# Altium PCB DRV8711.PcbDoc
Units mil, origin at the board's own origin, x right, y up, seen from the top; angles counter-clockwise.
Board outline 6000 x 4000 mil, 2 copper layers (Top Layer, Bottom Layer); 58 components, 44 nets, 187 pads, 101 vias.
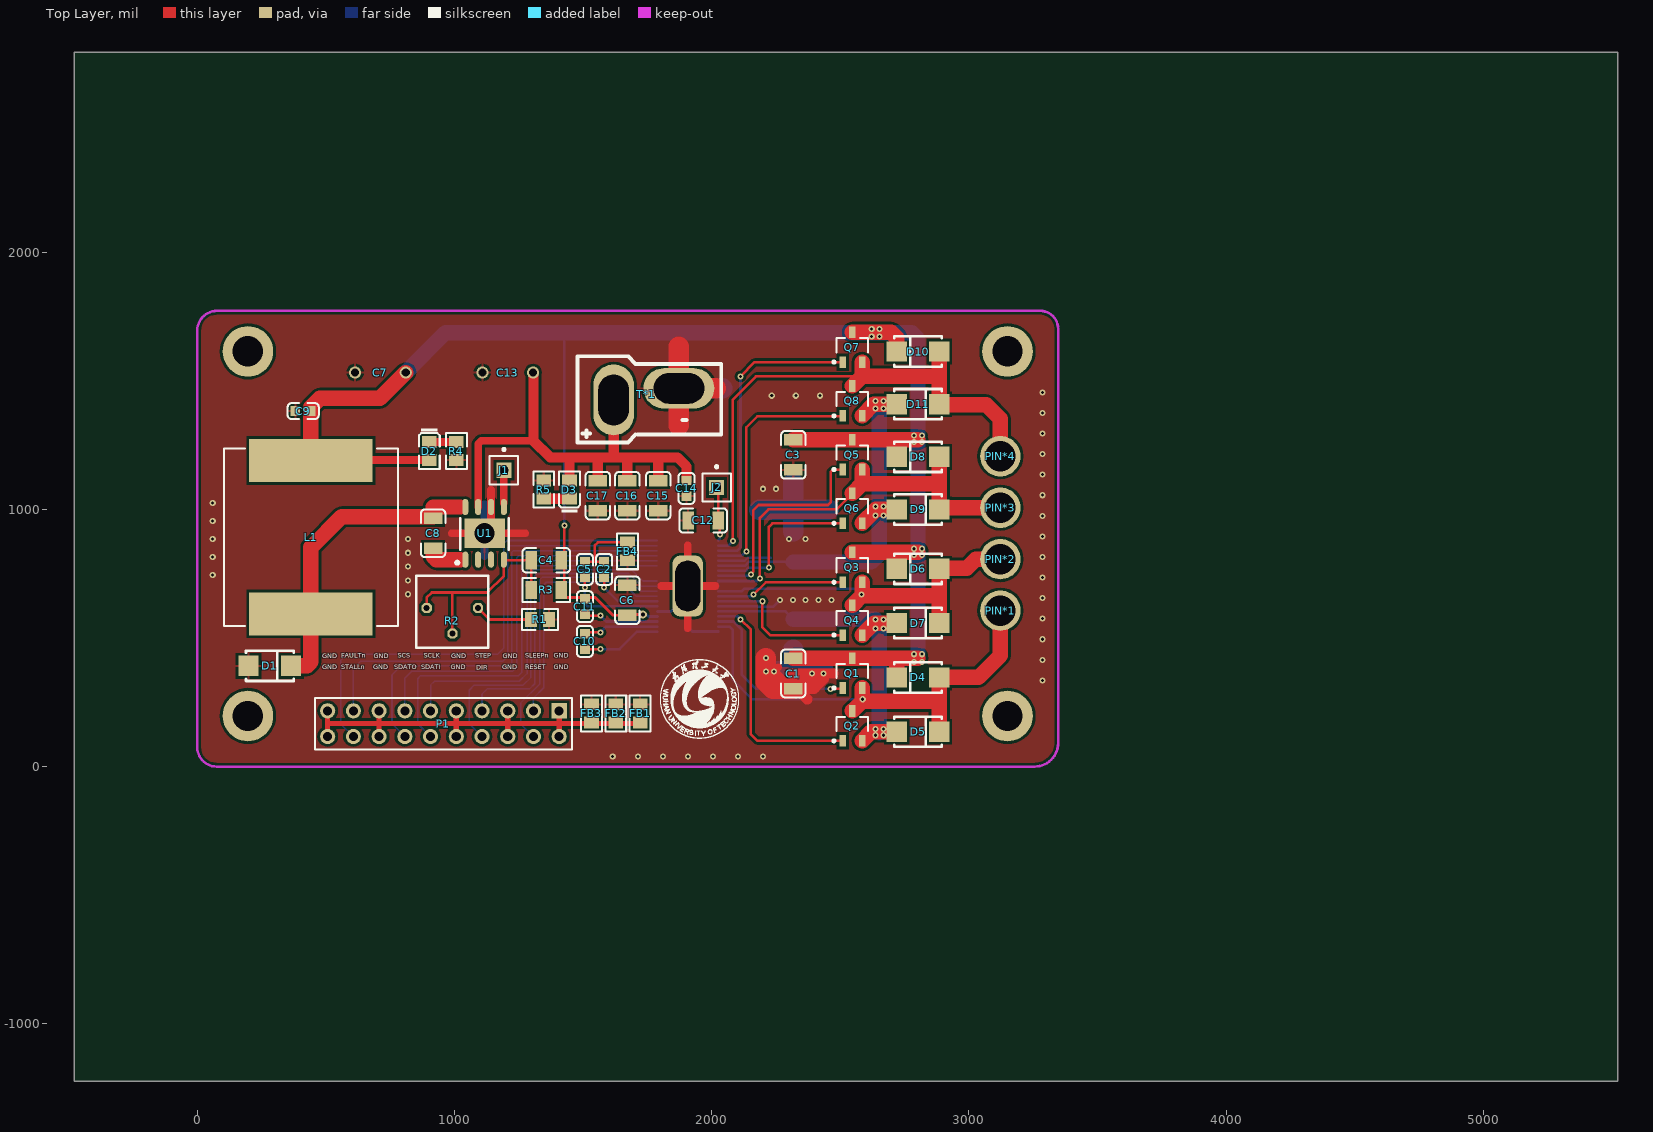
[diagram p0: Top Layer view]
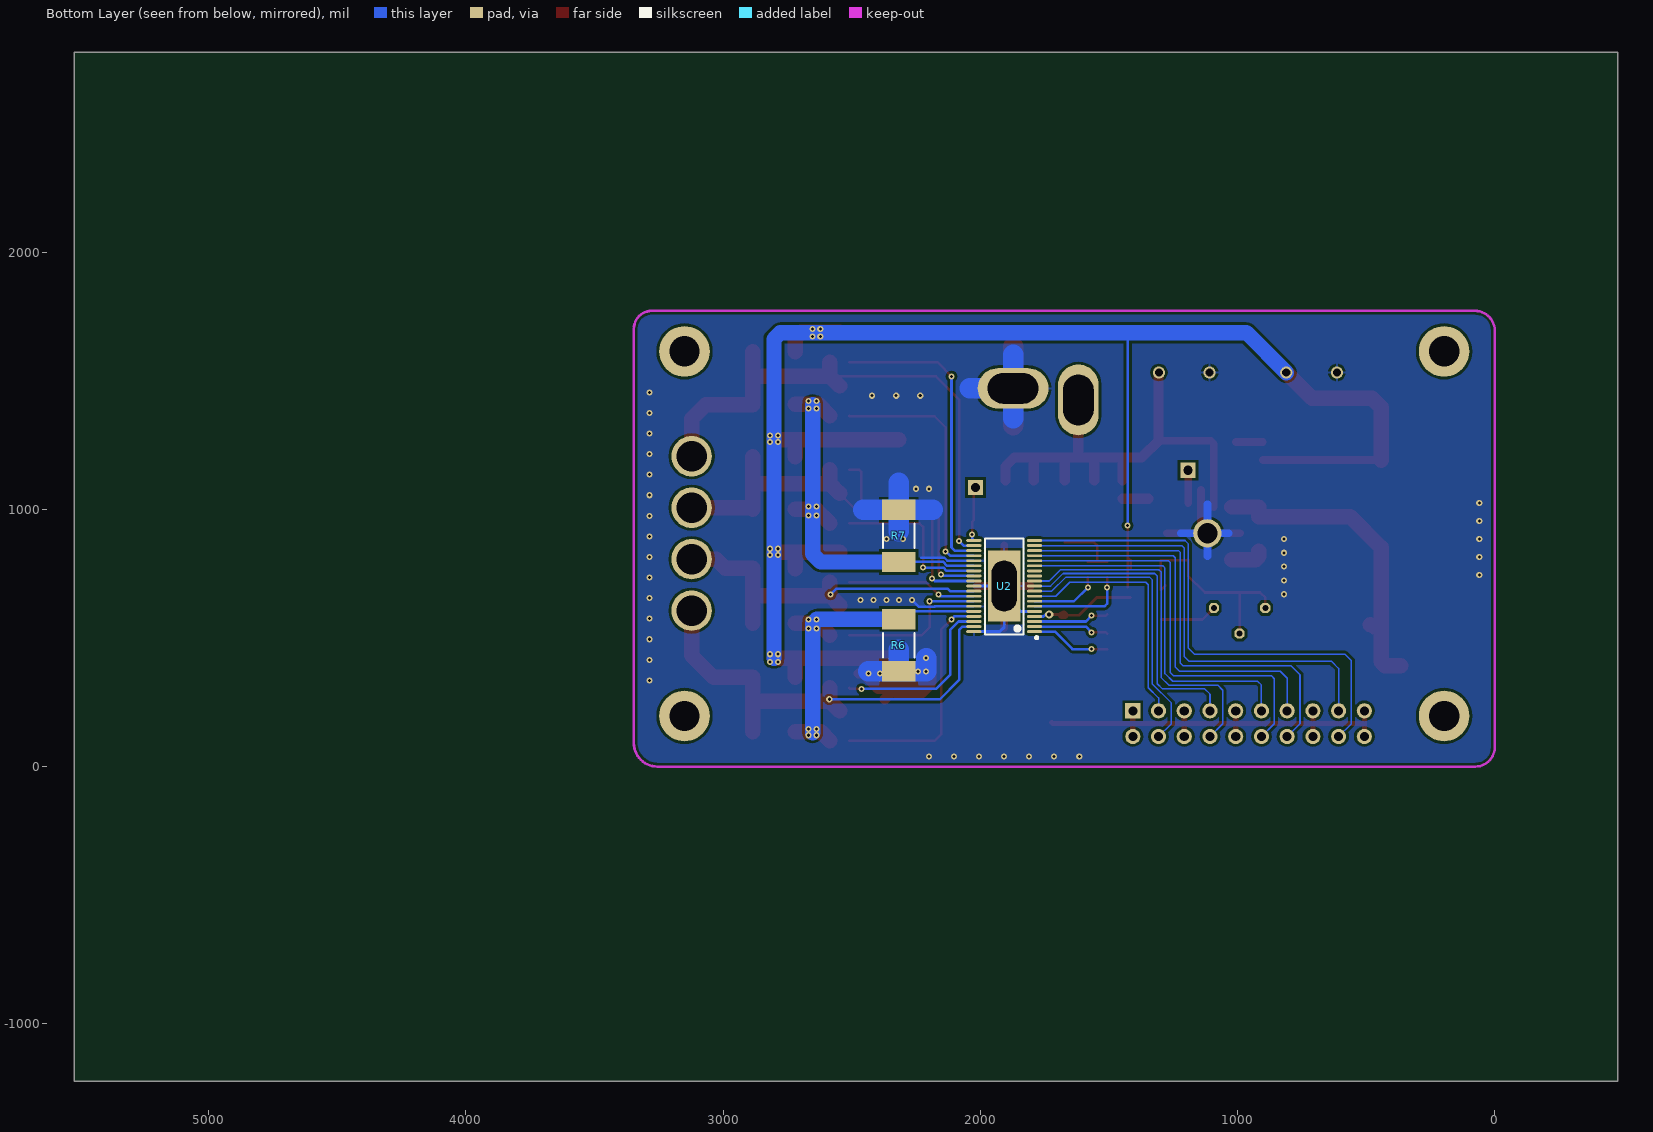
[diagram p1: Bottom Layer view, seen from below]

## Layer stack, top to bottom
Top Solder: solder mask 0.4, Solder Resist, Dk 3.5
Top Layer: signal copper 1.4
Dielectric 1: dielectric 12.6, FR-4, Dk 4.8
Bottom Layer: signal copper 1.4
Bottom Solder: solder mask 0.4, Solder Resist, Dk 3.5

## Board outline
-478.15,-1223.15 5521.85,-1223.15 5521.85,2776.85 -478.15,2776.85

## Design rules (kind name [scope] priority, off if disabled: settings)
Clearance [All] p1: gap=10 ignorepadtopadclearanceinfootprint=FALSE except(0: Arc-Hole Track-Hole SMDPad-Hole THPad-Hole Via-Hole Fill-Hole Poly-Hole Region-Hole Text-Hole; 5: Arc-Arc Arc-Track Arc-SMDPad Arc-Via Track-Track Track-SMDPad Track-Via SMDPad-SMDPad SMDPad-Via THPad-Via)
PolygonConnect [All] p1: thpad.connectstyle=Relief thpad.reliefconductorwidth=10 thpad.reliefentries=4 thpad.polygonreliefangle="90 Angle" thpad.airgapwidth=10 smdpad.connectstyle=Relief smdpad.reliefconductorwidth=10 smdpad.reliefentries=4 smdpad.polygonreliefangle="90 Angle" smdpad.airgapwidth=10 via.connectstyle=Direct via.reliefconductorwidth=10 via.reliefentries=4 via.polygonreliefangle="90 Angle" via.airgapwidth=10
RoutingVias [All] p1: holewidth=28 width=50 viastyle="Through Hole" minholewidth=11.81 minwidth=23.62 maxholewidth=28 maxwidth=50
SolderMaskExpansion [All] p1: expansion=4
Width [All] p1: maxlimit=90 minlimit=5 preferedwidth=20 minimp=50.000000 maximp=50.000000 favimp=50.000000
30 further rules are at their usual default settings.

## Components (designator, comment, footprint, x,y, rotation, side; value= is the part's Value field where it differs from the comment)
C1 "10uF (106) 10% 50V" 1206_C 2316.85,361.85 r90 top
C2 "1uF (105) 10% 50V" 0603_C 1581.85,766.85 r270 top
C3 "10uF (106) 10% 50V" 1206_C 2316.85,1211.85 r90 top
C4 "1nF (102) 10% 500V" 1206_C 1356.85,801.85 r180 top
C5 "100nF (104) 10% 50V" 0603_C 1506.85,766.85 r270 top
C6 "4.7uF (475) 10% 50V" 1206_C 1671.85,646.85 r90 top
C7 "Cap" C100uF 711.85,1531.85 r90 top value=100uF
C8 "10nF (103) 10% 50V" 1206_C 916.85,906.85 r90 top
C9 "10nF (103) 10% 50V" 0603_C 411.85,1381.85 r0 top
C10 "100nF (104) 10% 50V" 0603_C 1506.85,486.85 r270 top
C11 "1uF (105) 10% 50V" 0603_C 1506.85,621.85 r270 top
C12 "1nF (102) 10% 500V" 1206_C 1966.85,956.85 r0 top
C13 "Cap" C100uF 1206.85,1531.85 r90 top value=100uF
C14 "100nF (104) 10% 50V" 0603_C 1901.85,1081.85 r90 top
C15 "10uF (106) 10% 50V" 1206_C 1791.85,1053.19 r90 top
C16 "10uF (106) 10% 50V" 1206_C 1671.85,1053.19 r90 top
C17 "4.7uF (475) 10% 50V" 1206_C 1556.85,1053.19 r270 top
D1 "SS54" SMA(DO-214AC)_S1 281.85,391.85 r180 top
D2 "蓝灯 0805" 0805_LED_S1 901.85,1226.85 r270 top
D3 "红灯 0805" 0805_LED_S1 1446.85,1076.85 r90 top
D4 "SS54" SMA(DO-214AC)_S1 2801.85,346.61 r0 top
D5 "SS54" SMA(DO-214AC)_S1 2801.85,135.42 r180 top
D6 "SS54" SMA(DO-214AC)_S1 2801.85,768.99 r0 top
D7 "SS54" SMA(DO-214AC)_S1 2801.85,557.8 r180 top
D8 "SS54" SMA(DO-214AC)_S1 2801.85,1204.23 r0 top
D9 "SS54" SMA(DO-214AC)_S1 2801.85,999.71 r180 top
D10 "SS54" SMA(DO-214AC)_S1 2801.85,1613.28 r0 top
D11 "SS54" SMA(DO-214AC)_S1 2801.85,1408.76 r180 top
FB1 "600Ω ±25% 100MHz" 0805_L 1721.85,206.89 r90 top
FB2 "600Ω ±25% 100MHz" 0805_L 1626.85,206.89 r90 top
FB3 "100Ω ±25% 100MHz" 0805_L 1531.85,206.89 r90 top
FB4 "600Ω ±25% 100MHz" 0805_L 1671.85,836.85 r270 top
J1 "Socket" PIN1 1191.85,1151.85 r0 top
J2 "Socket" PIN1 2018.87,1085 r0 top
L1 "Inductor" INDP175172X70M 441.85,891.85 r90 top value=15uH
P1 "Header 10X2" HDR2X10 1406.85,216.85 r180 top
PIN*1 "PIN" PIN 3121.85,606.54 r270 top
PIN*2 "PIN" PIN 3121.85,806.54 r270 top
PIN*3 "PIN" PIN 3121.85,1006.54 r270 top
PIN*4 "PIN" PIN 3121.85,1206.54 r270 top
Q1 "AO3400A N道沟 X0YV1T SOT-23" SOT-23-3L 2546.85,363.76 r270 top
Q2 "AO3400A N道沟 X0YV1T SOT-23" SOT-23-3L 2546.85,158.28 r270 top
Q3 "AO3400A N道沟 X0YV1T SOT-23" SOT-23-3L 2546.85,774.71 r270 top
Q4 "AO3400A N道沟 X0YV1T SOT-23" SOT-23-3L 2546.85,569.23 r270 top
Q5 "AO3400A N道沟 X0YV1T SOT-23" SOT-23-3L 2546.85,1212.8 r270 top
Q6 "AO3400A N道沟 X0YV1T SOT-23" SOT-23-3L 2546.85,1003.99 r270 top
Q7 "AO3400A N道沟 X0YV1T SOT-23" SOT-23-3L 2546.85,1630.42 r270 top
Q8 "AO3400A N道沟 X0YV1T SOT-23" SOT-23-3L 2546.85,1421.61 r270 top
R1 "510Ω (5100) ±1%" 0805_R 1331.85,571.85 r180 top
R2 "RPot" RP1 991.85,566.85 r180 top value=1K
R3 "10KΩ (1002) ±1%" 1206_R 1356.85,686.85 r180 top
R4 "5.1KΩ (5101) ±1%" 0805_R 1006.85,1226.85 r270 top
R5 "5.1KΩ (5101) ±1%" 0805_R 1346.85,1076.85 r90 top
R6 "Res" 2512 2316.85,471.85 r270 bottom value=0.15R
R7 "Res" 2512 2316.85,896.85 r90 bottom value=0.15R
T*1 "T头" T插 1821.85,1441.85 r180 top
U1 "TPS5450" LC-SOP-8_EP_150mil 1116.85,906.85 r0 top
U2 "DRV8711" LC-HTSSOP-38 1906.85,701.85 r90 bottom

## Footprints (in the part's own frame and the unit in brackets; to place one, negate y for a bottom-side part, rotate by r counter-clockwise, add the part's x,y. Pads: shape width x height; smd on the part's side, far side on the other; paste and mask are expansions set on the pad)
0603_C [mm]
  rect 0.93x0.98 smd: 1(-0.77,0) 2(0.77,0)
  silkscreen extent -1.53,-0.79 1.54,0.79, body extent -0.8,-0.4 0.8,0.4, height 0.3
0805_L [mm]
  rect 1.16x1.47 smd: 1(-0.89,0) 2(0.89,0)
  silkscreen extent -1.77,-1.04 1.77,1.03, body extent -1.02,-0.64 1.03,0.64, height 0.6
0805_LED_S1 [mm]
  rect 1.16x1.47 smd: A(0.89,0) K(-0.89,0)
  silkscreen extent -2.25,-1.04 1.77,1.03, body extent -1.01,-0.62 1.01,0.62, height 1.1
0805_R [mm]
  rect 1.16x1.47 smd: 1(-0.89,0) 2(0.89,0)
  silkscreen extent -1.77,-1.04 1.77,1.03, body extent -1,-0.62 1,0.63, height 0.49
1206_C [mm]
  rect 1.13x1.8 smd: 1(-1.49,0) 2(1.49,0)
  silkscreen extent -2.36,-1.2 2.35,1.2, body extent -1.6,-0.81 1.6,0.79, height 1
1206_R [mm]
  rect 1.13x1.8 smd: 1(-1.49,0) 2(1.49,0)
  silkscreen extent -2.36,-1.2 2.35,1.2, body extent -1.7,-0.86 1.65,0.87, height 0.85
2512 [mm]
  rect 2x3.3 smd: 1(-2.575,0) 2(2.575,0)
  silkscreen extent -1.2,-1.55 1.2,1.55, body extent -3.18,-1.6 3.18,1.6, height 0.65
C100uF [mm]
  round 1.2 hole 0.8: 1(0,2.5) 2(0,-2.5)
HDR2X10 [mm] "Connector; Header; 10x2 Position"
  rect 1.5x1.5 hole 0.9: 1(0,0)
  round 1.5 hole 0.9: 2(0,2.54) 3(2.54,0) 4(2.54,2.54) 5(5.08,0) 6(5.08,2.54) 7(7.62,0) 8(7.62,2.54) 9(10.16,0) 10(10.16,2.54) 11(12.7,0) 12(12.7,2.54) 13(15.24,0) 14(15.24,2.54) 15(17.78,0) 16(17.78,2.54) 17(20.32,0) 18(20.32,2.54) 19(22.86,0) 20(22.86,2.54)
  silkscreen extent -1.27,-1.27 24.13,3.81, body extent -1.27,-1.27 24.13,3.81, height 7.58
INDP175172X70M [mm] "Precision Wire Wound Inductor, 2-Leads, Body 17.50x17.15mm, IPC Low Density"
  rect 4.25x12.2 smd: 1(-7.575,0) 2(7.575,0)
  silkscreen extent -8.75,-8.6 8.75,8.6, body extent -8.75,-8.57 8.75,8.57, height 7
LC-HTSSOP-38 [mm] "DRV8711"
  rect 7x3.2 smd mask+0.051: 0(0,0)
  oval 0.28x1.5 smd mask+0.051: 1(-4.5,-3) 2(-4,-3) 3(-3.5,-3) 4(-3,-3) 5(-2.5,-3) 6(-2,-3) 7(-1.5,-3) 8(-1,-3) 9(-0.5,-3) 10(0,-3) 11(0.5,-3) 12(1,-3) 13(1.5,-3) 14(2,-3) 15(2.5,-3) 16(3,-3) 17(3.5,-3) 18(4,-3) 19(4.5,-3) 20(4.5,3) 21(4,3) 22(3.5,3) 23(3,3) 24(2.5,3) 25(2,3) 26(1.5,3) 27(1,3) 28(0.5,3) 29(0,3) 30(-0.5,3) 31(-1,3) 32(-1.5,3) 33(-2,3) 34(-2.5,3) 35(-3,3) 36(-3.5,3) 37(-4,3) 38(-4.5,3)
  silkscreen extent -5.22,-3.32 4.7,1.9
LC-SOP-8_EP_150mil [mm] "TPS5450"
  rect 4x2.9 smd: 0(0,0)
  oval 0.6x1.6 smd: 1(-1.905,-2.6) 2(-0.635,-2.6) 3(0.635,-2.6) 4(1.905,-2.6) 5(1.905,2.6) 6(0.635,2.6) 7(-0.635,2.6) 8(-1.905,2.6)
  silkscreen extent -2.85,-3.05 2.4,1.5
PIN [mm]
  round 4 hole 3: 1(0,0)
PIN1 [mm] "Connector; Plug"
  rect 1.5x1.5 hole 0.9: 1(0,0)
  silkscreen extent -1.4,-1.4 1.4,2.17
RP1 [mm]
  oct 1x1 hole 0.6: 1(-2.54,-1.27) 2(0,1.27) 3(2.54,-1.27)
  silkscreen extent -3.56,-4.45 3.56,2.67, body extent -3.56,-4.45 3.56,2.67, height 6.35
SMA(DO-214AC)_S1 [mm]
  rect 2x2 smd: 1(2.1,0) 2(-2.1,0)
  silkscreen extent -2.35,-1.5 2.35,1.5
SOT-23-3L [mm] "http://www.aosmd.com/res/packaging_information/SOT-23-3L.pdf"
  rect 1.15x0.65 smd: 1(1.475,-0.95) 2(1.475,0.95) 3(-1.475,0)
  silkscreen extent -0.9,-1.95 1.6,1.55, body extent -0.9,-1.55 0.9,1.55, height 1.25
T插 [mm]
  oval 4x7 hole 3 slot 5 at 90 deg: 1(5.161,0.416)
  oval 7x4 hole 3 slot 5 at 0 deg: 2(-1.283,-0.727)
  silkscreen extent -5.46,-3.9 8.75,4.61

## Part data
C1 C3 C15 C16: library part "1206 10uF (106) 10% 50V", "贴片电容", Package=1206, SuppliersPartNumber=C13585, ComponentLink1Description=供应商链接, ComponentLink1URL=http://www.szlcsc.com/product/details_14236.html, Supplier=LC
C2 C11: library part "0603 1uF (105) 10% 50V", "贴片电容", Package=0603, SuppliersPartNumber=C15849, ComponentLink1Description=供应商链接, ComponentLink1URL=http://www.szlcsc.com/product/details_16531.html, Supplier=LC
C4 C12: library part "1206 1nF (102) 10% 500V", "贴片电容", Package=1206, SuppliersPartNumber=C35216, ComponentLink1Description=供应商链接, ComponentLink1URL=http://www.szlcsc.com/product/details_36187.html, Supplier=LC
C5 C10 C14: library part "0603 100nF (104) 10% 50V", "贴片电容", Package=0603, SuppliersPartNumber=C14663, ComponentLink1Description=供应商链接, ComponentLink1URL=http://www.szlcsc.com/product/details_15331.html, Supplier=LC
C6 C17: library part "1206 4.7uF (475) 10% 50V", "贴片电容", Package=1206, SuppliersPartNumber=C29823, ComponentLink1Description=供应商链接, ComponentLink1URL=http://www.szlcsc.com/product/details_30577.html, Supplier=LC
C7 C13: "贴片电容", LatestRevisionDate=17-Jul-2002, LatestRevisionNote="Re-released for DXP Platform.", PackageReference=RAD-0.3, Published=8-Jun-2000, Publisher="Altium Limited"
C8: library part "1206 10nF (103) 10% 50V", "贴片电容", Package=1206, SuppliersPartNumber=C1846, ComponentLink1Description=供应商链接, ComponentLink1URL=http://www.szlcsc.com/product/details_2198.html, Supplier=LC
C9: library part "0603 10nF (103) 10% 50V", "贴片电容", Package=0603, SuppliersPartNumber=C57112, ComponentLink1Description=供应商链接, ComponentLink1URL=http://www.szlcsc.com/product/details_58143.html, Supplier=LC
D1 D4 D5 D6 D7 D8 D9 D10 D11: library part "SMA(DO-214AC) SS54", "二极管", Package=SMA(DO-214AC), SuppliersPartNumber=C22452, ComponentLink1Description=供应商链接, ComponentLink1URL=http://www.szlcsc.com/product/details_23178.html, Supplier=LC
D2: library part "0805 蓝灯", "发光二极管", Package=0805, SuppliersPartNumber=C2293, ComponentLink1Description=供应商链接, ComponentLink1URL=http://www.szlcsc.com/product/details_2666.html, Supplier=LC
D3: library part "0805 红灯", "发光二极管", Package=0805, SuppliersPartNumber=C2295, ComponentLink1Description=供应商链接, ComponentLink1URL=http://www.szlcsc.com/product/details_2668.html, Supplier=LC
FB1 FB2 FB4: library part "0805 600Ω 25% 100MHz", "贴片磁珠", Package=0805, SuppliersPartNumber=C1017, ComponentLink1Description=供应商, ComponentLink1URL=http://www.szlcsc.com/product/details_1369.html, Supplier=LC
FB3: library part "0805 100Ω 25% 100MHz", "贴片磁珠", Package=0805, SuppliersPartNumber=C1015, ComponentLink1Description=供应商, ComponentLink1URL=http://www.szlcsc.com/product/details_1367.html, Supplier=LC
P1: "Header, 10-Pin, Dual row", LatestRevisionDate=17-Jul-2002, LatestRevisionNote="Re-released for DXP Platform.", Publisher="Altium Limited"
Q1 Q2 Q3 Q4 Q5 Q6 Q7 Q8: "MOS(场效应管)", Package=SOT-23, SuppliersPartNumber=C20917, ComponentLink1Description=供应商链接, ComponentLink1URL=http://www.szlcsc.com/product/details_21629.html, Supplier=LC
R1: library part "0805 510Ω (5100) 1%", "贴片电阻", Package=0805, SuppliersPartNumber=C17734, ComponentLink1Description=供应商链接, ComponentLink1URL=http://www.szlcsc.com/product/details_18422.html, Supplier=LC
R2: "电位器", LatestRevisionDate=17-Jul-2002, LatestRevisionNote="Re-released for DXP Platform.", PackageReference=VR5, Published=8-Jun-2000, Publisher="Altium Limited", Set Position=0.5, Sim Note="Enter the Resistance value and the set point into parameter fields."
R3: library part "1206 10KΩ (1002) 1%", "贴片电阻", Package=1206, SuppliersPartNumber=C17902, ComponentLink1Description=供应商链接, ComponentLink1URL=http://www.szlcsc.com/product/details_18590.html, Supplier=LC
R4 R5: library part "0805 5.1KΩ (5101) 1%", "贴片电阻", Package=0805, SuppliersPartNumber=C27834, ComponentLink1Description=供应商链接, ComponentLink1URL=http://www.szlcsc.com/product/details_28584.html, Supplier=LC
R6 R7: "贴片电阻", LatestRevisionDate=17-Jul-2002, LatestRevisionNote="Re-released for DXP Platform.", PackageReference=AXIAL-0.3, Published=8-Jun-2000, Publisher="Altium Limited"
T*1: library part Tͷ
J1 J2: LatestRevisionDate=17-Jul-2002, LatestRevisionNote="Re-released for DXP Platform.", Publisher="Altium Limited"
L1: Code_IEC=1005, Code_JEITA=0402, LatestRevisionDate=29-May-2009, LatestRevisionNote="IPC-7351 Footprint Added.", PackageDescription="Chip Inductor", PackageReference=0402-A, Published=8-Jun-2000, Publisher="Altium Limited"

## Free pads (board coordinates)
  round 196.85 hole 118.11: 0(196.85,196.85) 0(196.85,1614.17) 0(3149.61,196.85) 0(3149.61,1614.17)
  rrect50% 118.11x236.22 hole 98.43 slot 196.85 at 90 deg: 0(1906.85,701.85)
  round 110.24 hole 78.74: 5(1116.85,906.85)

## Via types
v1: diameter 23.62, hole 11.81, Top Layer to Bottom Layer, tented both sides, 100 vias
v2: diameter 31.5, hole 15.75, Top Layer to Bottom Layer, tented both sides, 1 vias

## Nets (pads, with @x,y where several pads share a name; then routed paths per layer and width w, separated by ;. In a path a pad name is that pad's centre, name@x,y a point inside that pad or via, vN(x,y) a via of type N, cw(c..) or ccw(c..) an arc to the next point about the centre after c; other vN are vias at no path point)
5V0: C5.2 U2.6 | length 389.5
  Top Layer w10: v1(1506.85,696.85) C5.2
  Bottom Layer w10: v1(1506.85,696.85) 1506.85,633.11 1516.85,623.11 U2.6
A1HS: Q1.1 U2.36 | length 697.2
  Top Layer w10: v1(2461.85,301.85) 2505.62,301.85 Q1.1
  Bottom Layer w10: U2.36 2084.65,564.06 2117.17,531.54 2117.17,356.54 2171.85,301.85 v1(2461.85,301.85)
A1LS: Q2.1 U2.35 | length 923
  Top Layer w10: v1(2112.01,572.01) 2151.85,532.17 2151.85,125.42 2177.06,100.21 Q2.1
  Bottom Layer w10: U2.35 2100.28,583.74 v1(2112.01,572.01)
A2HS: Q3.1 U2.31 | length 506.9
  Top Layer w10: v1(2161.85,668.43) 2210.06,716.64 Q3.1
  Bottom Layer w10: U2.31 2155.91,662.48 v1(2161.85,668.43)
A2LS: Q4.1 U2.32 | length 598.5
  Top Layer w10: v1(2196.85,642.8) 2196.85,541.16 2226.85,511.16 Q4.1
  Bottom Layer w10: U2.32 v1(2196.85,642.8)
AISENP: D5.1 D7.1 Q2.2 Q4.2 R6.1 U2.34 | length 1374.9
  Top Layer w60: Q2.2 2619.47,135.42 D5.1 ; Q4.2 2630.89,557.8 D7.1
  Bottom Layer w10: U2.34 2286.65,603.43 R6.1
  Bottom Layer w60: R6.1 2635.47,573.23 v1(2636.85,571.85) 2651.85,556.85 2651.85,131.85
  other v1: 2636.85,121.85 2666.85,121.85 2636.85,146.85 2666.85,146.85 2636.85,536.85 2666.85,536.85 2666.85,571.85
AOUT1: D4.1 D5.2 PIN*1.1 Q1.2 Q2.3 U2.37 | length 1858.2
  Top Layer w60: Q2.3 v1@2584.25,253.75 ; Q1.2 v1@2584.25,253.75 ; D5.2 2884.53,256.85 ; PIN*1.1 3121.85,431.85 3036.85,346.85 2884.53,346.85 D4.1 2884.53,256.85 ; v1@2584.25,253.75 2881.43,253.75 2884.53,256.85
  Bottom Layer w10: U2.37 2069.33,544.37 2081.85,531.85 2081.85,336.85 2156.85,261.85 v1(2586.85,261.85)
AOUT2: D6.1 D7.2 PIN*2.1 Q3.2 Q4.3 U2.30 | length 1442.3
  Top Layer w60: Q4.3 v1@2584.25,664.7 ; Q3.2 v1@2584.25,664.7 ; D7.2 2884.53,666.85 ; PIN*2.1 3026.54,806.54 2991.85,771.85 2884.53,771.85 D6.1 2884.53,666.85 ; v1@2584.25,664.7 2882.38,664.7 2884.53,666.85
  Bottom Layer w10: U2.30 2117.17,682.17 2126.85,691.85 2558.43,691.85 v1(2581.85,668.43)
B1HS: Q5.1 U2.27 | length 865.4
  Top Layer w10: v1(2151.85,746.85) 2151.85,747.8 2161.85,757.8 2161.85,996.85 2181.85,1016.85 2451.85,1016.85 2461.85,1026.85 2461.85,1144.73 2471.85,1154.73 Q5.1
  Bottom Layer w10: U2.27 2146.22,741.22 v1(2151.85,746.85)
B1LS: Q6.1 U2.26 | length 653.8
  Top Layer w10: v1(2221.85,773.66) 2221.85,931.85 2235.92,945.92 Q6.1
  Bottom Layer w10: U2.26 2130.91,760.91 2143.66,773.66 v1(2221.85,773.66)
B2HS: Q7.1 U2.22 | length 1177.7
  Top Layer w10: v1(2111.85,1517.17) 2167.04,1572.35 Q7.1
  Bottom Layer w10: U2.22 2099.65,839.65 2111.85,851.85 v1(2111.85,1517.17)
B2LS: Q8.1 U2.23 | length 992.2
  Top Layer w10: v1(2134.25,836.85) 2134.25,1319.25 2176.85,1361.85 2507.76,1361.85 Q8.1
  Bottom Layer w10: U2.23 2117.36,819.96 v1(2134.25,836.85)
BEMF: C12.2 J2.1 U2.20 | length 214.2
  Top Layer w10: J2.1 2025.51,1078.36 C12.2 2031.85,950.51 v1(2031.85,901.85)
  Bottom Layer w10: U2.20 2031.85,885.91 v1(2031.85,901.85)
BIN1: U2.12
BIN2: U2.13
BISENP: D9.1 D11.1 Q6.2 Q8.2 R7.1 U2.25 | length 1538
  Top Layer w60: Q6.2 2638.04,999.71 D9.1 ; Q8.2 2629.47,1408.76 D11.1
  Bottom Layer w10: U2.25 2129.07,780.59 2145.33,796.85 2315.47,796.85 R7.1
  Bottom Layer w60: R7.1 2620.47,795.47 2651.85,826.85 2651.85,1391.85 2651.85,1406.85
  other v1: 2636.85,976.85 2666.85,976.85 2636.85,1011.85 2666.85,1011.85 2636.85,1391.85 2666.85,1391.85 2636.85,1421.85 2666.85,1421.85
BOUT1: D8.1 D9.2 PIN*3.1 Q5.2 Q6.3 U2.28 | length 1651.9
  Top Layer w10: v1(2186.85,731.85) 2186.85,966.85 2219.71,999.71 2484.49,999.71 Q6.3
  Top Layer w60: Q6.3 2584.25,1099.47 ; Q5.2 2584.25,1099.47 ; D9.2 D9.2@2884.53,1006.54 ; D8.1 2884.53,1101.85 ; PIN*3.1 D9.2@2884.53,1006.54 ; 2584.25,1099.47 2882.14,1099.47 2884.53,1101.85 ; D9.2@2884.53,1006.54 2884.53,1101.85
  Bottom Layer w10: U2.28 2176.54,721.54 v1(2186.85,731.85)
BOUT2: D10.1 D11.2 PIN*4.1 Q7.2 Q8.3 U2.21 | length 2174.3
  Top Layer w10: v1(2081.85,876.85) 2081.85,1426.85 2172.08,1517.08 2584.25,1517.08
  Top Layer w60: Q8.3 2584.25,1517.08 ; Q7.2 2584.25,1517.08 ; D10.1 2884.53,1516.85 ; PIN*4.1 3121.85,1351.85 3066.85,1406.85 2884.53,1406.85 D11.2 2884.53,1516.85 ; 2584.25,1517.08 2884.29,1517.08 2884.53,1516.85
  Bottom Layer w10: U2.21 2064.33,859.33 v1(2081.85,876.85)
DIR: P1.8 U2.11 | length 1385.2
  Bottom Layer w6: P1.8 1056.85,166.85 1056.85,296.85 1076.85,316.85 1266.85,316.85 1296.85,346.85 1296.85,756.85 1305.59,765.59 1688.11,765.59 1732.17,721.54 U2.11
EGND: C1.1 C3.1 C6.2 C7.1 C9.1 C12.1 C13.1 C14.1 C15.1 C16.1 C17.2 D1.1 FB1.2 FB2.2 FB3.2 FB4.2 pad.0@1906.85,701.85 pad.5 R1.1 R4.2 R5.2 R6.2 R7.2 T*1.2 U1.0 U1.6 U2.0 U2.5 U2.24 U2.29 U2.33 U2.38 | length 4935.7
  Top Layer w30: 989.78,906.85 U1.0 ; 1141.85,1075 U1.6 1141.85,931.85 U1.0 ; 1274.5,906.85 U1.0 ; 1803.66,701.85 pad.0@1906.85,701.85 ; 1906.85,538.5 pad.0@1906.85,701.85 ; 1906.85,859.28 pad.0@1906.85,701.85 ; 2013.66,701.85 pad.0@1906.85,701.85 ; v1(2242.4,370.47) 2258.12,386.2
  Top Layer w40: 2310.76,361.96 v1(2390,361.96) ; C1.1 C1.1@2330.04,303.19 ; 2371.38,261.85 C1.1@2330.04,303.19 ; 2471.85,361.96 v1(2435,361.96) ; C1.1@2330.04,303.19 C1.1@2331.23,303.19 ; C1.1@2331.23,303.19 2397.8,303.19 2412.5,317.89 ; C1.1@2331.23,303.19 v1(2390,361.96) ; v1(2390,361.96) 2390,340.39 2412.5,317.89 ; v1(2390,361.96) v1(2435,361.96) ; 2412.5,317.89 2435,340.39 v1(2435,361.96)
  Top Layer w80: 1872.36,1326.93 T*1.2 ; 1872.36,1632.64 T*1.2 ; 2015.09,1470.47 T*1.2 ; v1(2210.06,421.41) v1(2210.06,370.47) ; C1.1 2277.35,303.19 ; v1(2210.06,370.47) 2277.35,303.19 ; v1(2210.06,370.47) 2210.06,330.39 2237.26,303.19 2277.35,303.19
  Bottom Layer w10: U2.33 2176.54,623.11 2178.66,620.98 2238.1,620.98 v1(2265,647.88) ; U2.24 2127.54,800.28 2139.12,811.85 2228.78,811.85
  Bottom Layer w11: U2.5 1841.85,603.43 pad.0@1906.85,668.43 ; pad.0@1906.85,730.28 U2.0 ; U2.38 1924.02,524.69 1906.85,541.85 pad.0@1906.85,668.43 ; U2.29 U2.0 ; pad.0@1906.85,668.43 U2.0
  Bottom Layer w30: 1035,906.85 pad.5 ; 1116.85,818.43 pad.5 ; 1116.85,1020 pad.5 ; 1219.96,906.85 pad.5
  Bottom Layer w80: 1872.36,1355 T*1.2 ; 1872.36,1600 T*1.2 ; 2040.36,1470.47 T*1.2 ; 2185,998.23 R7.2 ; v1(2210.06,421.41) v1(2210.06,370.47) v1(2242.4,370.47) R6.2 ; 2316.85,455 R6.2 ; 2316.85,915 R7.2 ; 2316.85,1103.15 R7.2 ; v1@2435,370.47 R6.2 ; 2455,998.23 R7.2
  other v1: 1615,40 1712.5,40 1810,40 1907.5,40 2005,40 2102.5,40 2200,40 3285,335 3285,415 3285,495 3285,575 2315,647.88 2365,647.88 2415,647.88 2465,647.88 3285,655 819.52,670 819.52,723.75 3285,735 60,745 819.52,777.5 60,815 3285,815 819.52,831.25 60,885 819.52,885 2300,885.36 2365,885.36 3285,895 60,955 3285,975 60,1025 3285,1055 2200,1080 2250,1080 3285,1135 3285,1215 3285,1295 3285,1375 2233.19,1441.79 2326.59,1441.79 2420,1441.79 3285,1455
FAULTn: P1.17 U2.18 | length 1791.2
  Bottom Layer w6: P1.17 606.85,381.85 634.95,409.95 1188.34,409.95 1206.85,428.47 1206.85,849.33 1216.85,859.33 U2.18
GND: FB1.1 FB2.1 FB3.1 P1.1 P1.2 P1.5 P1.6 P1.9 P1.10 P1.15 P1.16 P1.19 P1.20 | length 1719.4
  Top Layer w20: P1.20 506.85,171.85 ; P1.19 506.85,171.85 ; P1.16 706.85,167.32 ; P1.15 706.85,167.32 ; P1.10 1006.85,167.32 ; P1.9 1006.85,167.32 ; P1.6 1206.85,167.32 ; P1.5 1206.85,167.32 ; P1.2 1406.85,166.85 ; P1.1 1406.85,167.32 ; FB1.1 1717.32,167.32 1406.85,167.32 ; 506.85,171.85 511.38,167.32 706.85,167.32 ; 706.85,167.32 1006.85,167.32 ; 1006.85,167.32 1206.85,167.32 ; 1206.85,167.32 1406.38,167.32 ; 1406.38,167.32 1406.85,167.32 ; 1406.38,167.32 1406.85,166.85 ; 1406.85,166.85 1406.85,167.32
NetC2_1: C2.1 C5.1 FB4.1 | length 269.9
  Top Layer w10: C5.1 1544.35,797.17 ; C2.1 1544.35,797.17 ; FB4.1 1556.89,871.89 1544.35,859.35 1544.35,797.17
NetC4_2: C4.2 R2.2 R2.3 R3.2 U1.4 | length 845.2
  Top Layer w10: R2.3 891.85,656.85 911.85,676.85 991.85,676.85 ; R2.2 991.85,676.85 ; R3.2@1280.55,704.49 R3.2 C4.2 1194.49,801.85 U1.4 1191.85,741.85 1126.85,676.85 991.85,676.85
NetC8_1: C8.1 U1.1 | length 131.4
  Top Layer w60: C8.1@916.85,838.11 916.85,816.85 929.21,804.49 1021.85,804.49
NetC8_2: C8.2 D1.2 L1.1 U1.8 | length 1274
  Top Layer w30: L1.1@441.85,573.62 L1.1@449.17,536.3
  Top Layer w60: D1.2 426.85,391.85 441.85,406.85 441.85,573.62 L1.1 441.85,852.17 561.54,971.85 916.85,971.85 916.85,1004.21 ; L1.1@449.17,536.3 463.74,542.54 L1.1@484.17,551.3 ; 916.85,1009.21 916.85,1004.21 ; 1021.85,1009.21 921.85,1009.21 916.85,1004.21
NetC10_1: C10.1 U2.2 | length 293.2
  Top Layer w10: C10.1 1511.54,521.85 v1(1566.85,521.85)
  Bottom Layer w10: v1(1566.85,521.85) 1589.37,544.37 U2.2
NetC10_2: C10.2 U2.1 | length 310.1
  Top Layer w10: C10.2 1507.17,456.85 v1(1566.85,456.85)
  Bottom Layer w10: v1(1566.85,456.85) 1641.85,456.85 1709.69,524.69 U2.1
NetC11_2: C11.2 U2.3 | length 293.3
  Top Layer w10: C11.2 1511.54,586.85 v1(1566.85,586.85)
  Bottom Layer w10: v1(1566.85,586.85) 1589.65,564.06 U2.3
NetD2_K: D2.K R4.1 | length 105
  Top Layer w30: D2.K R4.1
NetD3_K: D3.K R5.1 | length 100
  Top Layer w40: R5.1 D3.K
NetJ1_1: J1.1 U1.5 | length 122.6
  Top Layer w30: U1.5@1191.85,1024.21 J1.1@1191.85,1146.85
NetR1_2: R1.2 R2.1 | length 223.6
  Top Layer w10: R2.1 1136.85,571.85 R1.2
RESET: P1.4 U2.9 | length 1145.5
  Bottom Layer w6: P1.4 1256.85,166.85 1256.85,246.85 1331.85,321.85 1331.85,726.85 1341.85,736.85 1666.85,736.85 1721.54,682.17 U2.9
SCLK: P1.11 U2.14 | length 1414.4
  Bottom Layer w6: P1.11 906.85,316.85 921.85,331.85 1251.85,331.85 1281.85,361.85 1281.85,772.36 1290.08,780.59 U2.14
SCS: P1.13 U2.16 | length 1554.8
  Bottom Layer w6: P1.13 806.85,343.43 833.9,370.47 1225.47,370.47 1241.85,386.85 1241.85,811.85 1249.96,819.96 U2.16
SDATI: P1.12 U2.15 | length 1617.8
  Bottom Layer w6: P1.12 856.85,166.85 856.85,341.85 868.21,353.21 1248.21,353.21 1261.85,366.85 1261.85,794.23 1267.9,800.28 U2.15
SDATO: P1.14 U2.17 | length 1744.5
  Bottom Layer w6: P1.14 756.85,166.85 756.85,356.85 791.85,391.85 1211.85,391.85 1221.85,401.85 1221.85,831.85 1229.65,839.65 U2.17
SLEEPn: P1.3 U2.8 | length 975.1
  Bottom Layer w6: P1.3 1306.85,266.85 1346.85,306.85 1346.85,706.85 1356.85,716.85 1651.85,716.85 1706.22,662.48 U2.8
STALLn: P1.18 U2.19 | length 1978.4
  Bottom Layer w6: P1.18 556.85,166.85 556.85,411.85 581.85,436.85 1166.85,436.85 1191.85,461.85 1191.85,866.85 1204.02,879.02 U2.19
STEP: P1.7 U2.10 | length 1206.2
  Bottom Layer w6: P1.7 1106.85,281.85 1126.85,301.85 1291.34,301.85 1311.85,322.36 1311.85,740.59 1321.85,750.59 1678.11,750.59 1726.85,701.85 U2.10
VCC: C13.2 C14.2 C15.2 C16.2 C17.1 D3.A T*1.1 U1.7 | length 2062.2
  Top Layer w30: U1.7 1091.85,1255.28 1103.43,1266.85 1306.85,1266.85 ; 1601.85,1201.85 1618.66,1218.66 ; T*1.1@1618.66,1358.66 T*1.1@1646.85,1386.85
  Top Layer w40: C13.2@1306.85,1533.43 1306.85,1266.85 1371.85,1201.85 1451.85,1201.85 ; D3.A 1446.85,1196.85 1451.85,1201.85 ; C17.1 1556.85,1196.85 1561.85,1201.85 ; 1618.66,1218.66 T*1.1@1618.66,1358.66 ; C16.2 1671.85,1196.85 1676.85,1201.85 ; C15.2 1791.85,1196.85 1796.85,1201.85 ; C14.2 1901.85,1166.85 1866.85,1201.85 1796.85,1201.85 ; 1451.85,1201.85 1561.85,1201.85 ; 1561.85,1201.85 1601.85,1201.85 1676.85,1201.85 ; 1676.85,1201.85 1796.85,1201.85
  Top Layer w70: T*1.1@1618.66,1358.66 T*1.1
VINT: C2.2 U2.7 | length 269
  Top Layer w10: v1(1581.85,696.85) C2.2
  Bottom Layer w10: v1(1581.85,696.85) 1635.91,642.8 U2.7
VM: C1.2 C3.2 C4.1 C6.1 C7.2 C9.2 C11.1 D2.A D4.2 D6.2 D8.2 D10.2 L1.2 Q1.3 Q3.3 Q5.3 Q7.3 R3.1 U2.4 | length 7517.6
  Top Layer w10: C4.1@1415.51,771.85 C4.1 C4.1@1426.85,813.19 ; R3.1@1426.85,698.19 C4.1@1426.85,813.19 ; v1(1426.85,936.85) C4.1@1426.85,813.19
  Top Layer w11: R3.1@1415.51,656.85 1546.85,656.85 1615.51,588.19 C6.1 ; C6.1@1675.51,591.85 v2(1731.85,591.85)
  Top Layer w30: L1.2 443.58,1191.81 D2.A ; C6.1@1675.51,591.85 C6.1 C6.1@1681.85,588.19
  Top Layer w60: L1.2 441.85,1396.85 476.85,1431.85 710.28,1431.85 C7.2 ; C1.2 2318.16,421.83 Q1.3 2719.17,421.83 ; C3.2 2317.21,1270.87 Q5.3 2719.17,1270.87 ; Q3.3 2719.17,832.78 ; Q7.3 2697.53,1688.49 2719.17,1666.85 D10.2 ; D4.2 2719.17,421.83 ; D6.2 2719.17,832.78 ; D8.2 2719.17,1270.87 ; 2800.85,421.83 2719.17,421.83 ; 2800.87,1270.87 2719.17,1270.87 ; 2801.85,832.78 2719.17,832.78
  Bottom Layer w10: 1416.85,1686.85 1426.85,1676.85 v1(1426.85,936.85)
  Bottom Layer w11: v2(1731.85,591.85) 1746.85,591.85 1754.96,583.74 U2.4
  Bottom Layer w60: C7.2 965.28,1686.85 1416.85,1686.85 2776.85,1686.85 2801.85,1661.85 2801.85,1261.85 2801.85,846.85 2801.85,421.83
  other v1: 2786.85,406.85 2816.85,406.85 2786.85,436.85 2816.85,436.85 2786.85,821.85 2816.85,821.85 2786.85,846.85 2816.85,846.85 2786.85,1261.85 2816.85,1261.85 2786.85,1286.85 2816.85,1286.85 2621.85,1671.85 2651.85,1671.85 2621.85,1701.85 2651.85,1701.85
pads on no net: U1.2 U1.3

## Polygon pours and split planes (outlines as drawn)
EGND on Top Layer "EGND_L01_P002" (solid, remove dead copper, pour order 2): 0.32,1773.94 0.32,77.29 0.32,2.29 120.32,2.29 3341.78,2.29 3346.78,7.29 3346.78,1773.94
no net on Top Layer "NONET_L01_P000" (solid, remove dead copper, pour order 0): 1461.85,1491.85
EGND on Bottom Layer "EGND_L02_P004" (solid, remove dead copper, pour order 4): 2.4,1773.55 2.4,1.9 3348.86,1.9 3348.86,1773.55

## Keep-outs
Keep-Out Layer:
  lines w10: 0,75 ccw(c75,75) 75,0 3255,0 ccw(c3255,91.46) 3346.46,91.46 3346.46,1702.24 ccw(c3277.05,1702.24) 3277.05,1771.65 76.65,1771.65 ccw(c76.65,1695) 0,1695 0,75

## Other copper
Top Layer:
  pour cut-out: 1466.85,1506.85

## Silkscreen, mask and mechanical layers (free items; w line width, h text height)
Top Overlay:
  drawing of 2348 lines, arcs and shapes, not listed
  text "FAULTn" at 560,415 h32
  text "SCS" at 780,415 h32
  text "SCLK" at 880,415 h32
  text "STEP" at 1080,415 h32
  text "SLEEPn" at 1275,415 h32
  text "GND" at 1385,415 h32
  text "GND" at 485,413.85 h32
  text "GND" at 685.58,413.85 h32
  text "GND" at 986.44,413.85 h32
  text "GND" at 1187.02,413.85 h32
  text "GND" at 485,369.85 h32
  text "STALLn" at 560,370 h32
  text "GND" at 685,369.85 h32
  text "SDATO" at 765,370 h32
  text "SDATI" at 870,370 h32
  text "GND" at 985,369.85 h32
  text "DIR" at 1085,369.61 h32
  text "GND" at 1185,369.85 h32
  text "RESET" at 1275,370 h32
  text "GND" at 1385,369.85 h32